# Altium PCB filters.PcbDoc
Units mil, origin at the board's own origin, x right, y up, seen from the top; angles counter-clockwise.
Board outline 4180 x 3765 mil, 4 copper layers (Top Layer, Layer 1, Layer 2, Bottom Layer), stack 23.756 mil thick; 58 components, 34 nets, 151 pads, 0 vias.
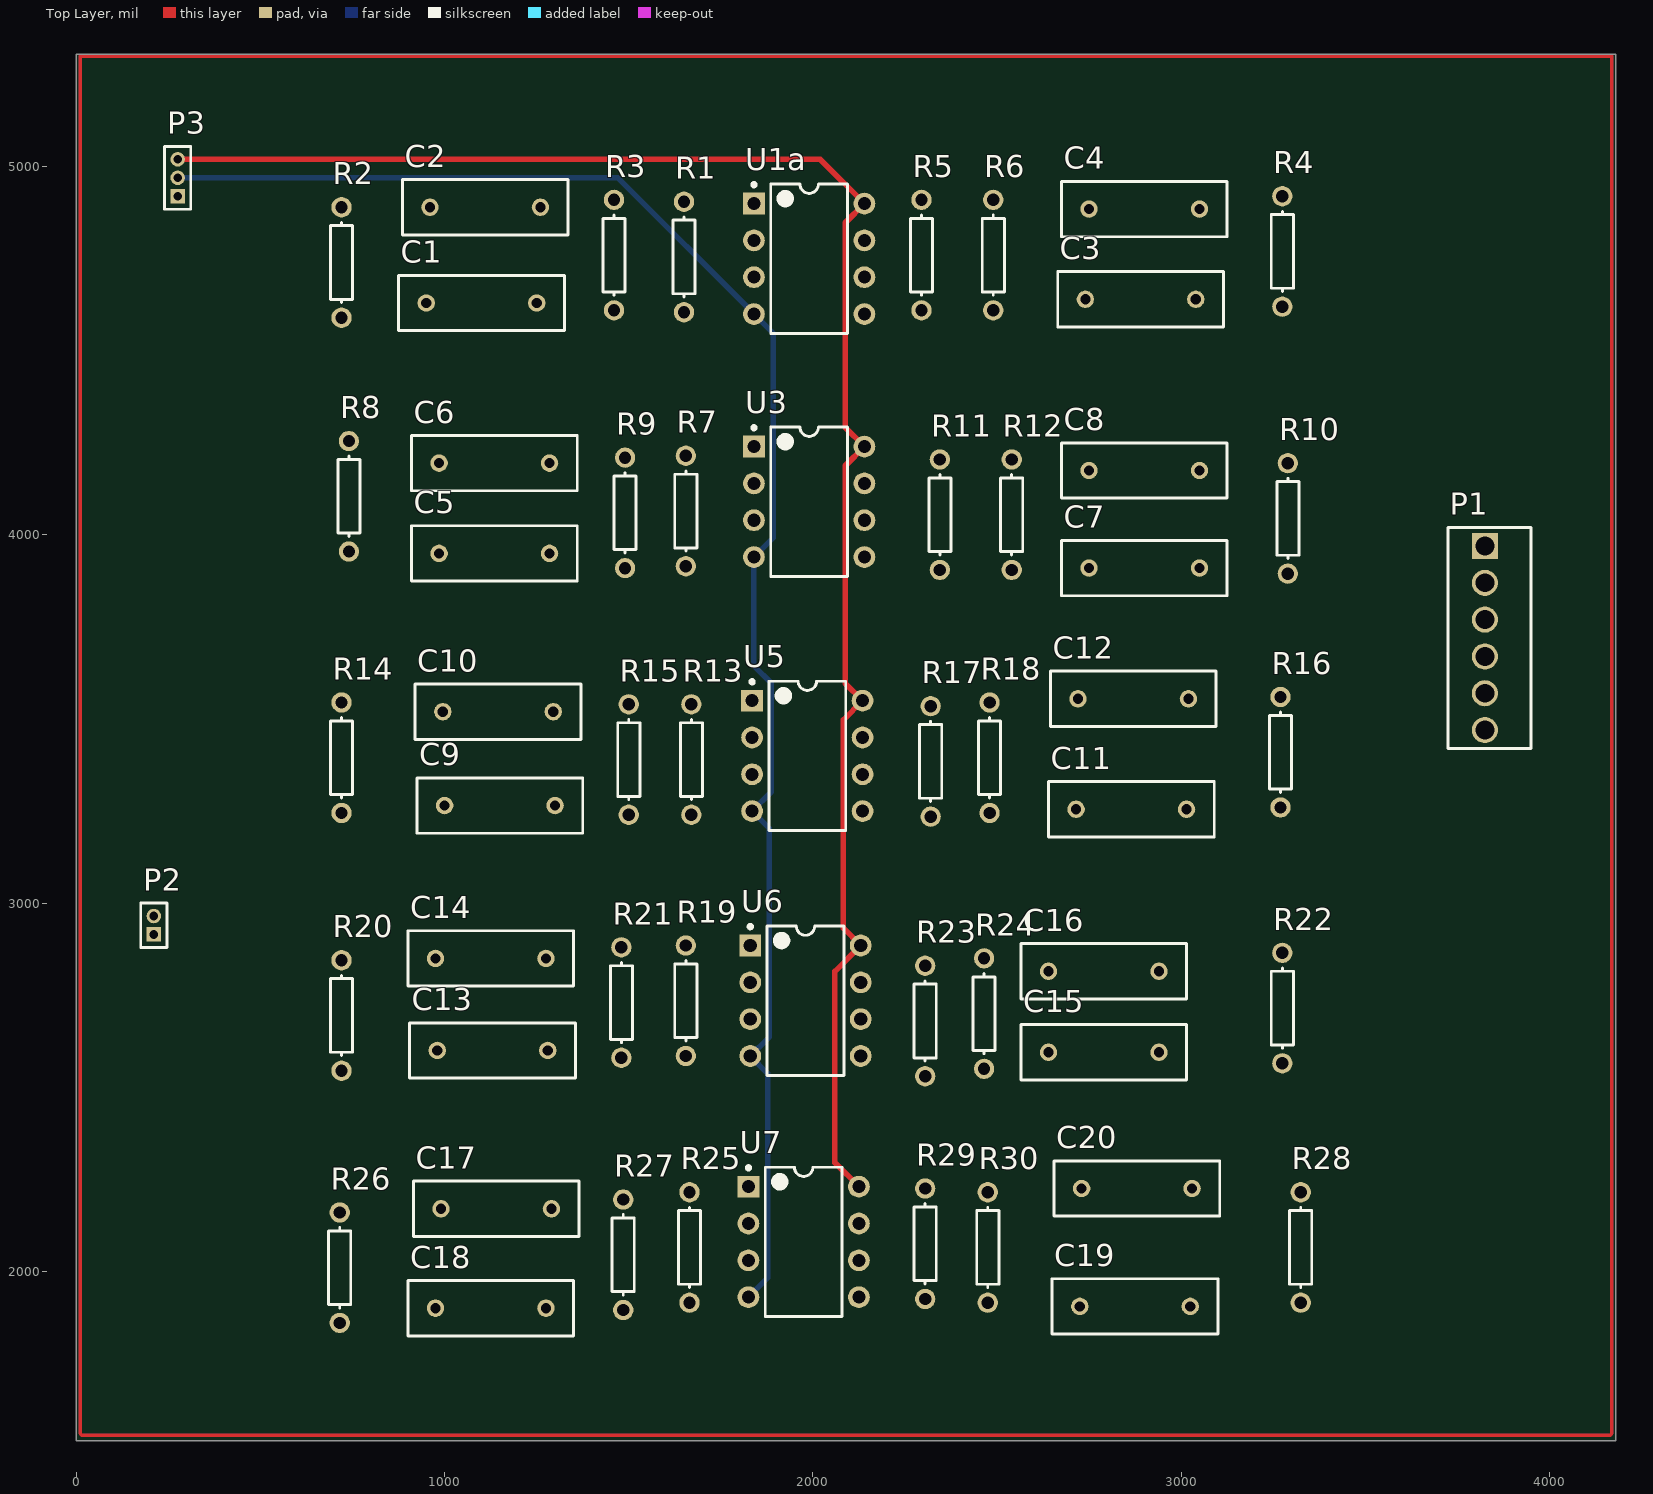
[diagram p0: Top Layer view]
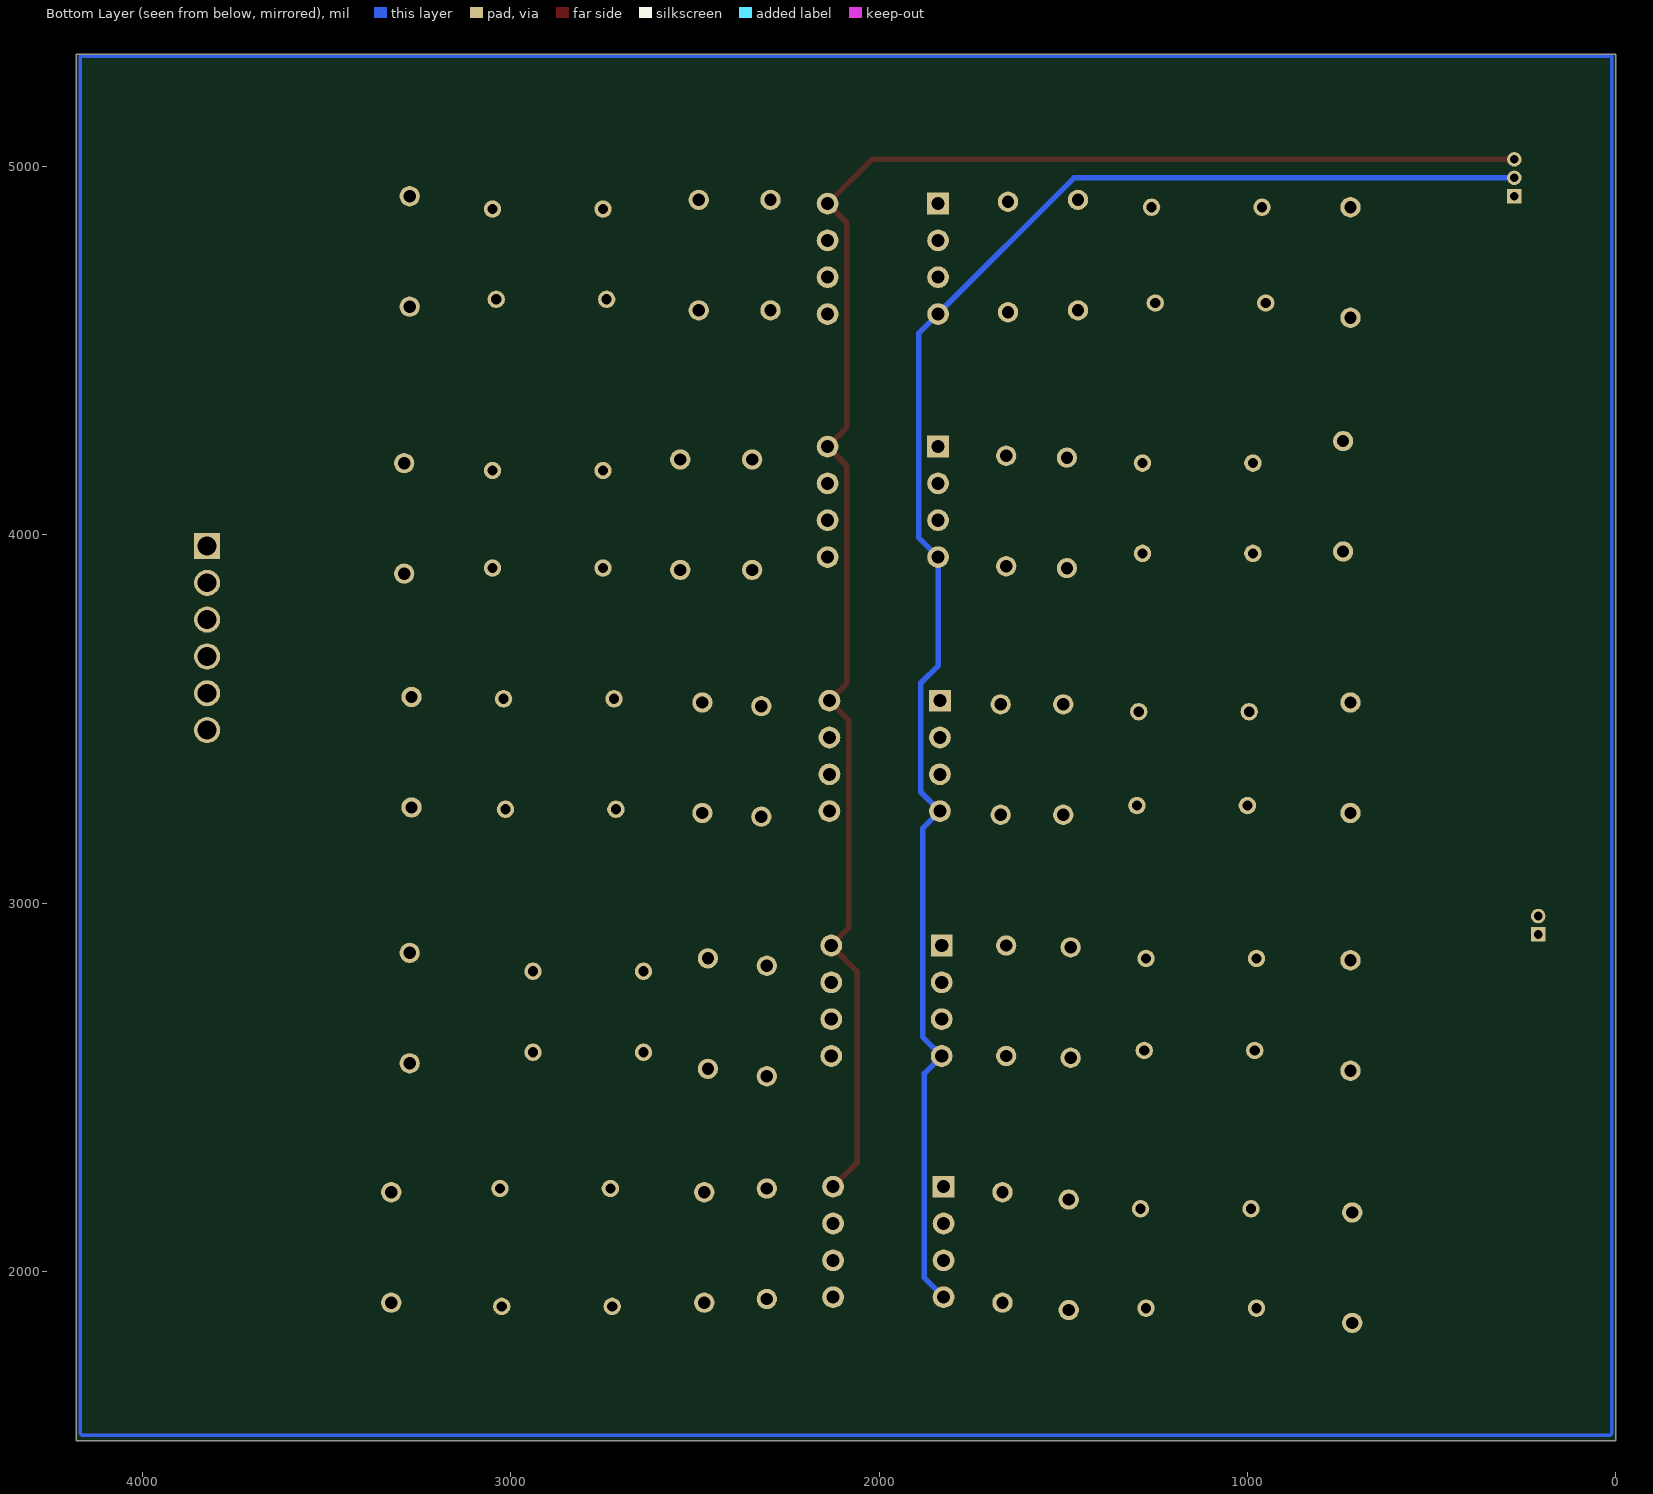
[diagram p1: Bottom Layer view, seen from below]
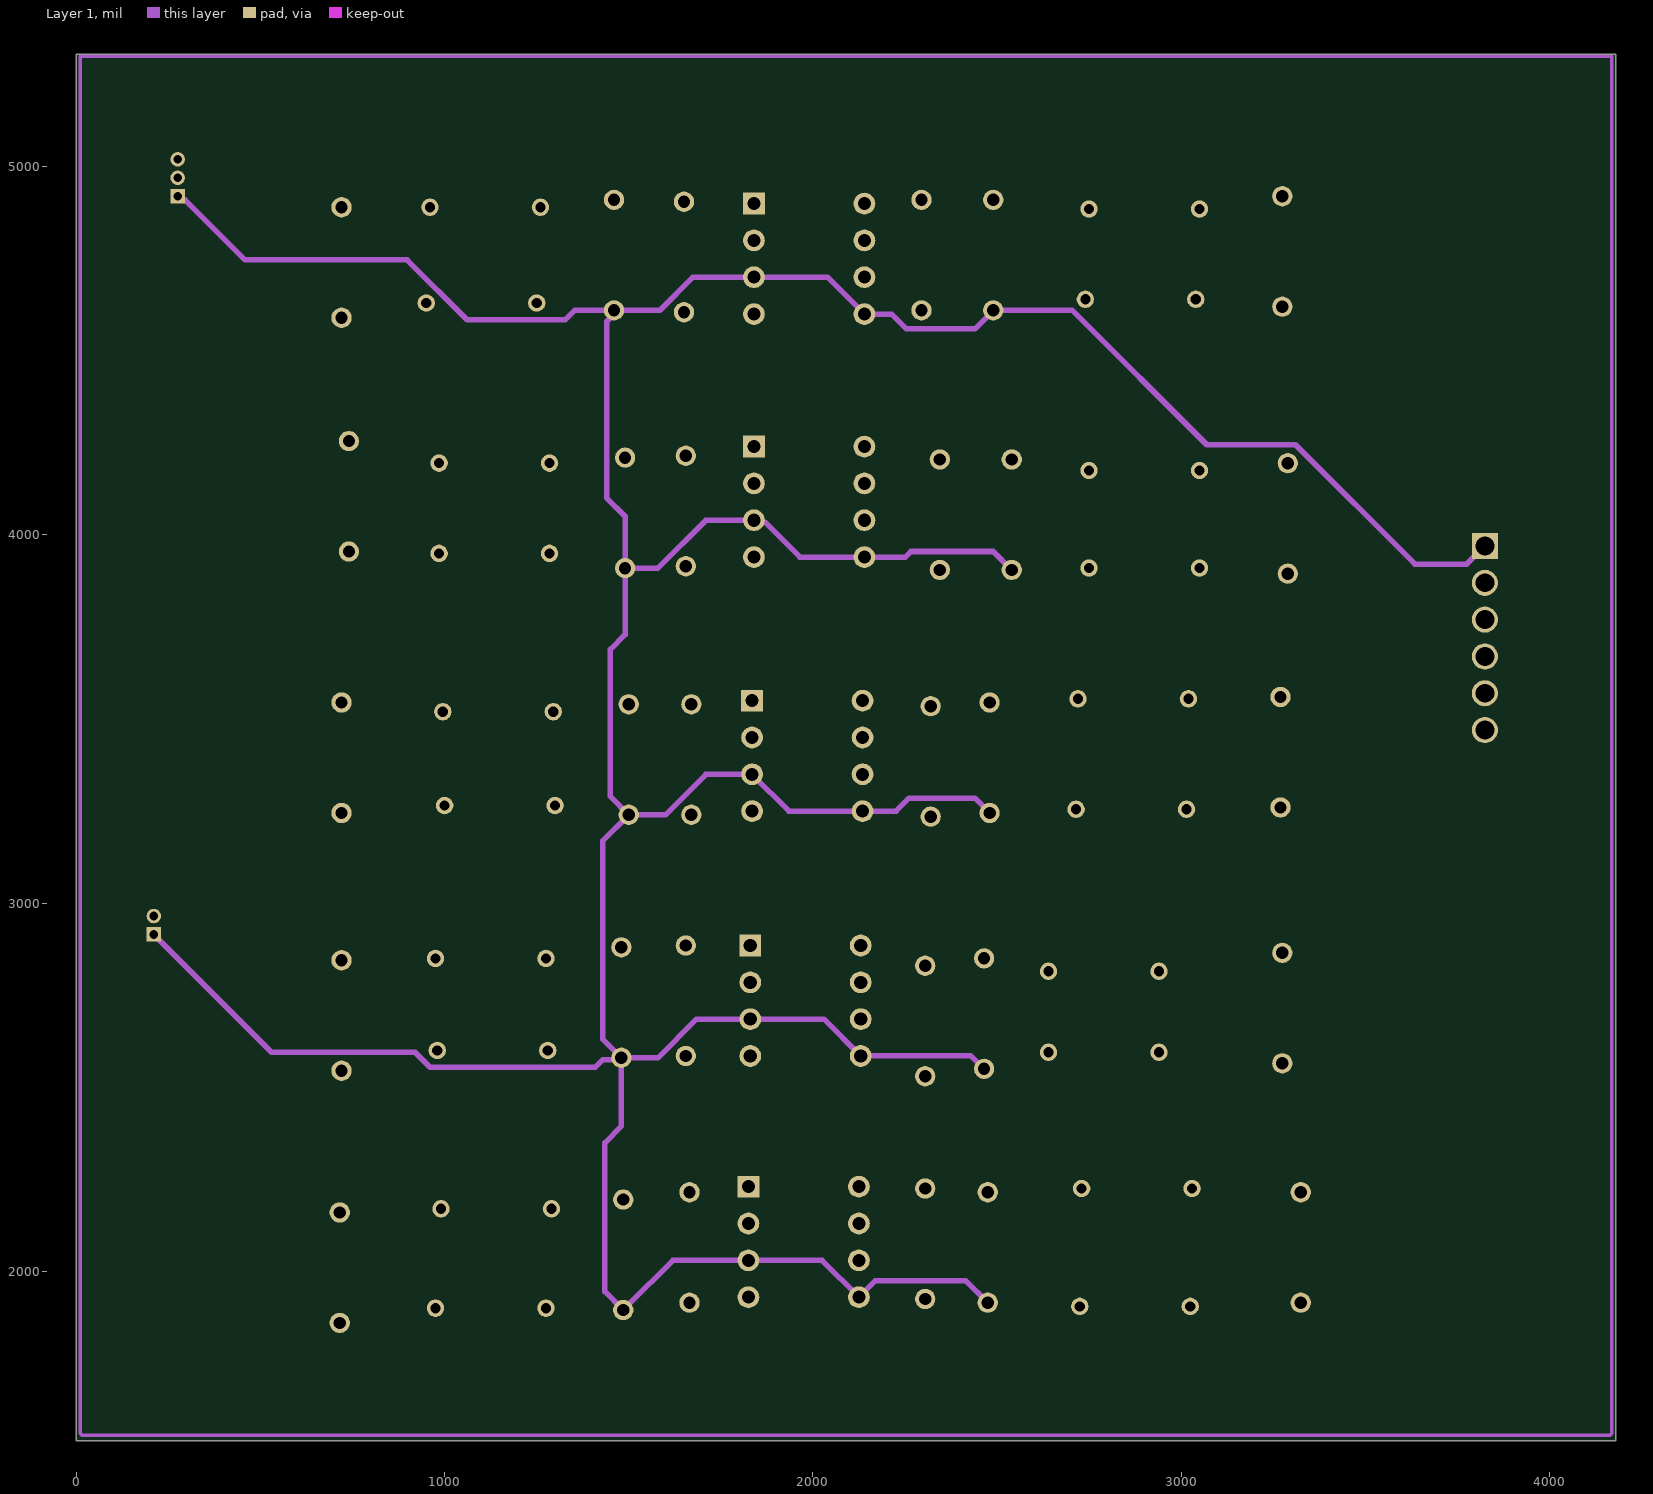
[diagram p2: Layer 1]
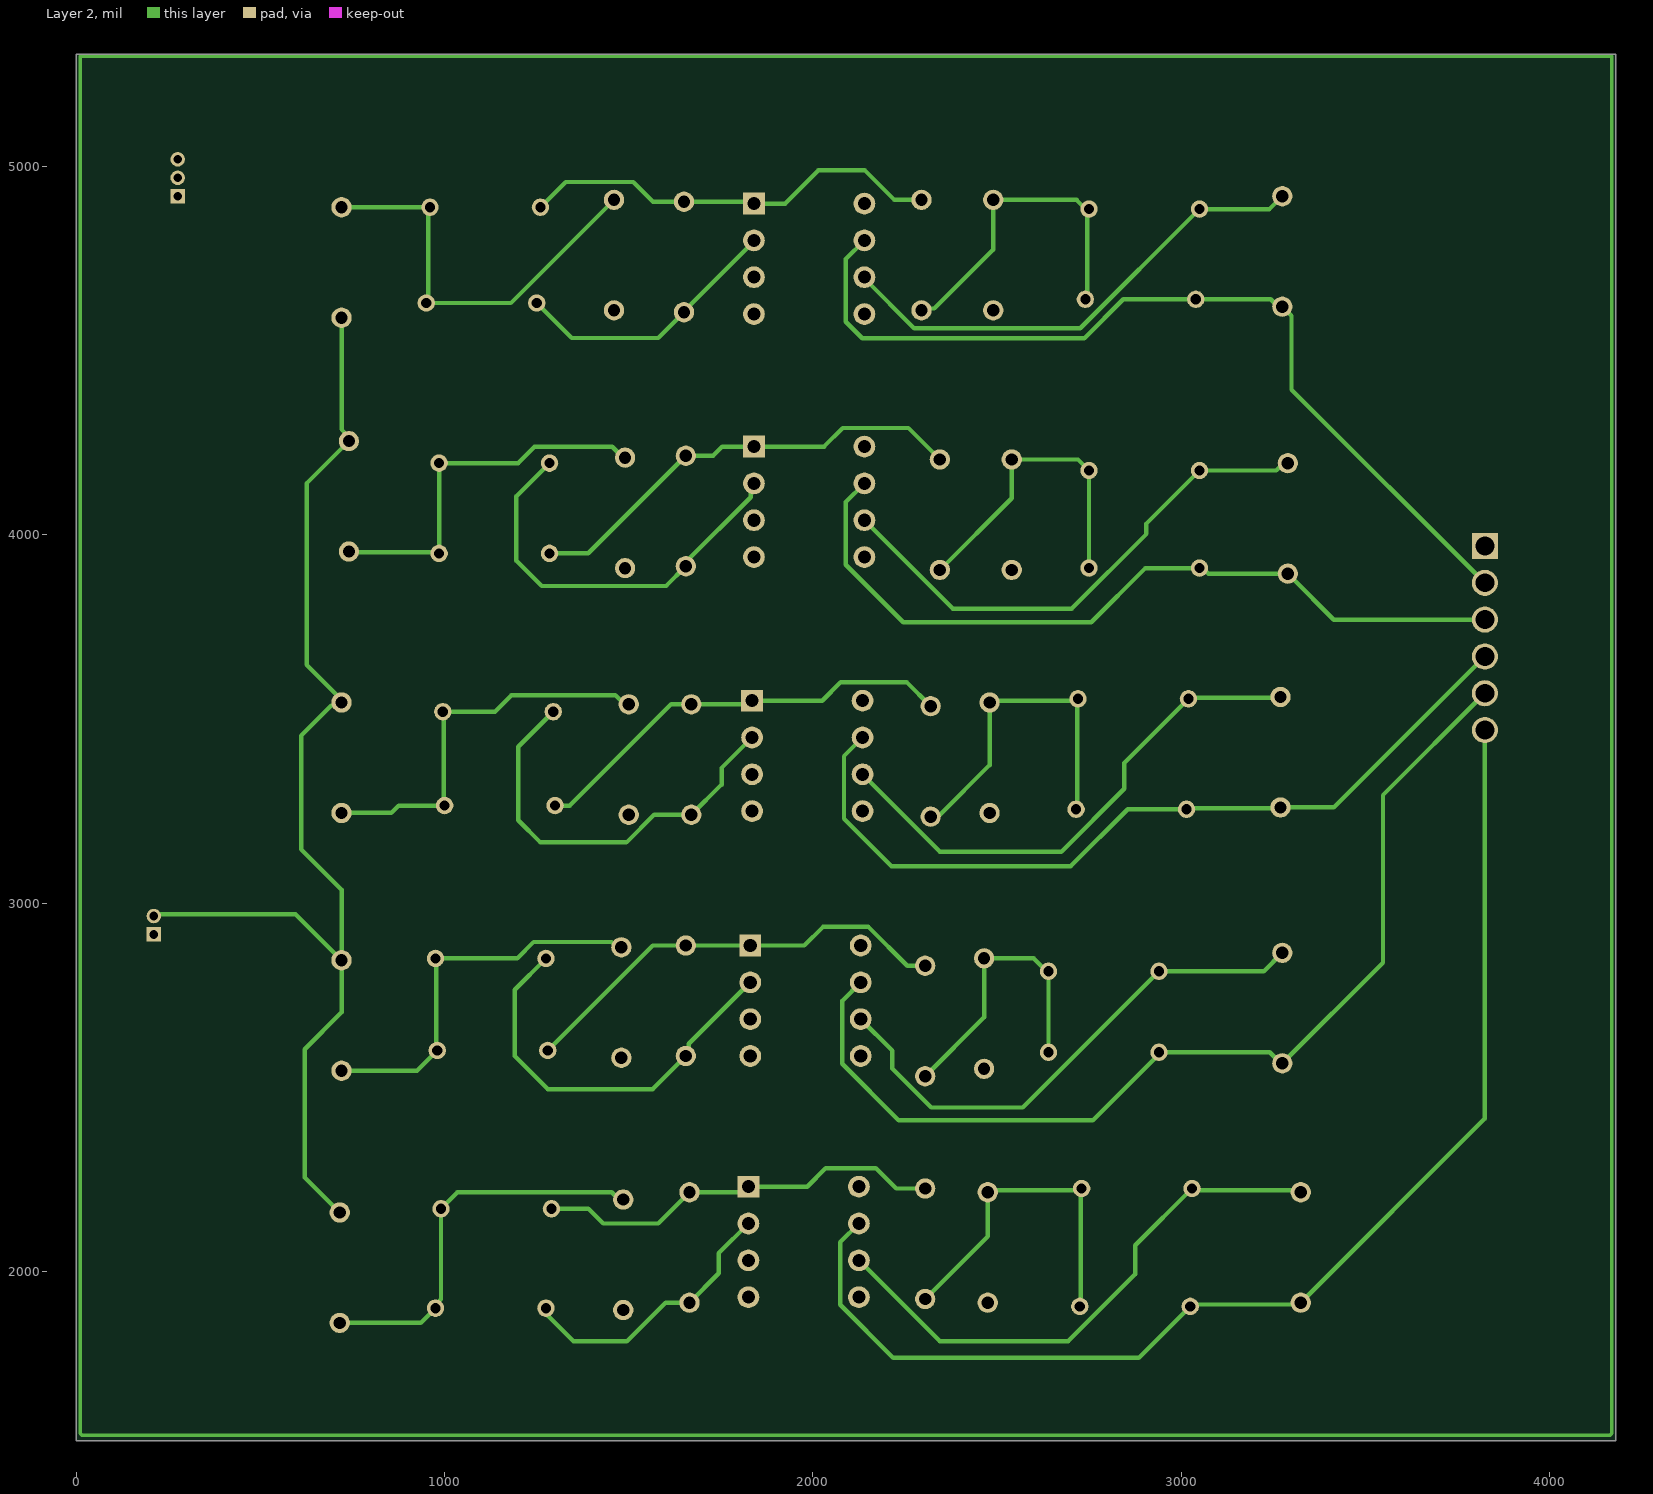
[diagram p3: Layer 2]

## Layer stack, top to bottom
Top Solder: solder mask 0.4, Solder Resist, Dk 3.5
Top Layer: signal copper 1.4
Dielectric 2: prepreg 2.8, PP-006, Dk 4.1
Layer 1: signal copper 1.378
Dielectric 1: dielectric 12.6, FR-4, Dk 4.8
Layer 2: signal copper 1.378
Dielectric 3: prepreg 2.8, PP-006, Dk 4.1
Bottom Layer: signal copper 1.4
Bottom Solder: solder mask 0.4, Solder Resist, Dk 3.5

## Board outline
0,1540 4180,1540 4180,5305 0,5305

## Design rules (kind name [scope] priority, off if disabled: settings)
Clearance [All] p1: gap=15 ignorepadtopadclearanceinfootprint=FALSE except(20: Arc-Hole Track-Hole SMDPad-Hole THPad-Hole Via-Hole Fill-Hole Poly-Hole Region-Hole Text-Hole)
PolygonConnect [All] p1: connectstyle=Relief reliefconductorwidth=10 reliefentries=4 polygonreliefangle="90 Angle" airgapwidth=10
RoomDefinition "filters tika.~(7)" [InComponentClass('filters tika.~(7)')] p1: confinementstyle=ConfineIn formatcopy=TRUE lockcomponents=FALSE outline 4975,2780 13440,2780 13440,3500 4975,3500
RoutingVias [All] p1: holewidth=28 width=50 viastyle="Through Hole" minholewidth=28 minwidth=50 maxholewidth=28 maxwidth=50
SolderMaskExpansion [All] p1: expansion=4 istentingtop=FALSE
Width [All] p1: maxlimit=25 minlimit=12 preferedwidth=20 toplayer_minwidth=15 midlayer1_minwidth=15 midlayer2_maxwidth=20 midlayer2_prefwidth=15 bottomlayer_minwidth=15 minimp=50.000000 maximp=50.000000 favimp=50.000000
30 further rules are at their usual default settings.

## Components (designator, comment, footprint, x,y, rotation, side; value= is the part's Value field where it differs from the comment)
C1 "" RAD-0.3 1100,4630 r180 top value=100nF
C2 "" RAD-0.3 1110,4890 r180 top value=100nF
C3 "" RAD-0.3 2890,4640 r180 top value=100nF
C4 "" RAD-0.3 2900,4885 r180 top value=100nF
C5 "" RAD-0.3 1135,3950 r180 top value=100nF
C6 "" RAD-0.3 1135,4195 r180 top
C7 "" RAD-0.3 2900,3910 r180 top value=100nF
C8 "" RAD-0.3 2900,4175 r180 top value=100nF
C9 "" RAD-0.3 1150,3265 r180 top value=10nF
C10 "" RAD-0.3 1145,3520 r180 top value=10nF
C11 "" RAD-0.3 2865,3255 r180 top value=10nF
C12 "" RAD-0.3 2870,3555 r180 top value=10nF
C13 "" RAD-0.3 1130,2600 r180 top value=10nF
C14 "" RAD-0.3 1125,2850 r180 top value=10nF
C15 "" RAD-0.3 2790,2595 r180 top value=10nF
C16 "" RAD-0.3 2790,2815 r180 top value=10nF
C17 "" RAD-0.3 1140,2170 r180 top value=1nF
C18 "C18" RAD-0.3 1125,1900 r180 top value=1nF
C19 "" RAD-0.3 2875,1905 r180 top value=1nF
C20 "" RAD-0.3 2880,2225 r180 top value=1nF
P1 "640456-6" TECO-640456-6_V 3825,3970 r270 top
P2 "MHDR1X2" MHDR1X2 210,2915 r90 top
P3 "MHDR1X3" MHDR1X3 275,4920 r90 top
R1 "" AXIAL-0.3 1650,4755 r270 top value=53.6K
R2 "" AXIAL-0.3 720,4740 r270 top value=11.5K
R3 "" AXIAL-0.3 1460,4760 r90 top value=13.7K
R4 "" AXIAL-0.3 3275,4770 r270 top value=14K
R5 "" AXIAL-0.3 2295,4760 r90 top value=2.94K
R6 "" AXIAL-0.3 2490,4760 r270 top value=3.57K
R7 "" AXIAL-0.3 1655,4065 r270 top value=15K
R8 "" AXIAL-0.3 740,4105 r90 top value=3.48K
R9 "" AXIAL-0.3 1490,4060 r90 top value=1.5K
R10 "" AXIAL-0.3 3290,4045 r270 top value=5.76K
R11 "" AXIAL-0.3 2345,4055 r90 top value=1.33K
R12 "" AXIAL-0.3 2540,4055 r270 top value=576
R13 "" AXIAL-0.3 1670,3390 r270 top value=37.4K
R14 "" AXIAL-0.3 720,3395 r90 top value=8.66K
R15 "" AXIAL-0.3 1500,3390 r90 top value=4.87K
R16 "" AXIAL-0.3 3270,3410 r270 top value=13K
R17 "" AXIAL-0.3 2320,3385 r90 top value=2.94K
R18 "" AXIAL-0.3 2480,3395 r270 top value=1.69K
R19 "" AXIAL-0.3 1655,2735 r270 top value=15.4K
R20 "" AXIAL-0.3 720,2695 r90 top value=3.74K
R21 "" AXIAL-0.3 1480,2730 r90 top value=909
R22 "" AXIAL-0.3 3275,2715 r270 top value=7.15K
R23 "" AXIAL-0.3 2305,2680 r90 top value=1.74K
R24 "" AXIAL-0.3 2465,2700 r270 top value=422
R25 "" AXIAL-0.3 1665,2065 r270 top value=82.5K
R26 "" AXIAL-0.3 715,2010 r90 top value=20.5K
R27 "" AXIAL-0.3 1485,2045 r90 top value=2.87K
R28 "" AXIAL-0.3 3325,2065 r270 top value=45.3K
R29 "" AXIAL-0.3 2305,2075 r90 top value=11.3K
R30 "" AXIAL-0.3 2475,2065 r270 top value=1.58K
U1a "LM4562NA" N08E 1990,4750 r0 top
U3 "LM4562NA" N08E 1990,4090 r0 top
U5 "LM4562NA" N08E 1985,3400 r0 top
U6 "LM4562NA" N08E 1980,2735 r0 top
U7 "LM4562NA" N08E 1975,2080 r0 top

## Footprints (in the part's own frame and the unit in brackets; to place one, negate y for a bottom-side part, rotate by r counter-clockwise, add the part's x,y. Pads: shape width x height; smd on the part's side, far side on the other; paste and mask are expansions set on the pad)
AXIAL-0.3 [mm] "Axial Device, Thru-Hole; 2 Leads; 0.3 in Pin Spacing"
  round 1.4 hole 0.85: 1(-3.81,0) 2(3.81,0)
  silkscreen extent -2.77,-0.76 2.77,0.76
MHDR1X2 [mm] "Connector; Header; 2 Position"
  rect 1x1 hole 0.6: 1(0,0)
  round 1 hole 0.6: 2(1.27,0)
  silkscreen extent -0.9,-0.9 2.17,0.9
MHDR1X3 [mm] "Connector; Header; 3 Position"
  rect 1x1 hole 0.6: 1(0,0)
  round 1 hole 0.6: 2(1.27,0) 3(2.54,0)
  silkscreen extent -0.9,-0.9 3.44,0.9
N08E [mm] "DIP, 8-Pin, Row Spacing 7.62 mm, Pitch 2.54 mm"
  rect 1.5x1.5 hole 0.9: 1(-3.81,3.81)
  round 1.5 hole 0.9: 2(-3.81,1.27) 3(-3.81,-1.27) 4(-3.81,-3.81) 5(3.81,-3.81) 6(3.81,-1.27) 7(3.81,1.27) 8(3.81,3.81)
  silkscreen extent -3.93,-5.15 2.65,5.23, body extent -3.6,-5.15 3.6,5.15, height 5.33
RAD-0.3 [mm] "Radial Cap, Thru-Hole; 2 Leads; 0.3 in Pin Spacing"
  round 1.2 hole 0.7: 1(-3.81,0) 2(3.81,0)
  silkscreen extent -5.71,-1.91 5.71,1.91
TECO-640456-6_V [mm] "THD, 6-Leads, Body 15.24x5.72mm, Pitch 2.54mm"
  rect 1.8x1.8 hole 1.3: 1(0,0)
  round 1.8 hole 1.3: 2(2.54,0) 3(5.08,0) 4(7.62,0) 5(10.16,0) 6(12.7,0)
  silkscreen extent -1.27,-2.54 13.97,3.18, body extent -1.27,-2.54 13.97,3.18, height 10.03

## Part data
C1 C2 C3 C4 C5 C6 C7 C8 C9 C10 C11 C12 C13 C14 C15 C16 C17 C18 C19 C20: library part Cap, "Capacitor", LatestRevisionDate=17-Jul-2002, LatestRevisionNote="Re-released for DXP Platform.", PackageDescription="Radial Cap, Thru-Hole; 2 Leads; 0.3 in Pin Spacing", PackageReference=RAD-0.3, Published=8-Jun-2000, Publisher="Altium Limited"
P1: library part CMP-2000-05661-1, "Male Header, Pitch 2.54 mm, 1 x 6 Position, Height 10.03 mm, Tail Length 3.56 mm, -55 to 105 degC, Bulk", Color=White, Current, Rating="5 /  / A", Flammability Rating=UL94V-0, Manufacturer="TE Connectivity", Package Description="Male Header, Pitch 2.54 mm, 1 x 6 Position, Height 10.03 mm, Tail Length 3.56 mm", Temperature, Operating="-55to+105 /  / °C", Voltage, Rating="250 /  / V", Agency Approvals=CSA,UL, Angle=Straight, Brand/Series=MTA-100Series, Color, Housing=White, Connector Type=MTA-100, Contact Centerline Spacing="0.100 /  / in.", Contact Mating Area Plating=Tin, Contact Plating=Tin, Contact Shape=Square, Contact Termination Area Plating=Tin, Datasheet URL=https://datasheet.ciiva.com/25618/0900766b80eb7fdd-25618163.pdf, Datasheet Version="Rev. W, 05/2005", Length, Overall="0.6 /  / \"", Length, Pin="0.14 /  / \"", Length, Terminal Post="0.14 /  / in.", Manufacturer URL=http://www.te.com/, Material, Contact=CopperAlloy, Material, Housing=Polyester, Mount Angle=Vertical, Mounting Hole Size="0.04 /  / \"", Mounting Technology=ThroughHole, Mounting Type=PCMount, Number of Contacts=6, Number of Positions=6, Number of Rows=1, Package Reference=640456-6, Pin Spacing="0.1 /  / \"", Primary Type=InterconnectSystem, Size, Post="0.025 /  / in.", Special Features=Pinstrip, Standards=RoHSCompliant,ELVCompliant,UL94V-0, Termination=Solder, Type=PCBPlug
P2: "Header, 2-Pin", LatestRevisionDate=17-Jul-2002, LatestRevisionNote="Re-released for DXP Platform.", Publisher="Altium Limited"
P3: "Header, 3-Pin", LatestRevisionDate=17-Jul-2002, LatestRevisionNote="Re-released for DXP Platform.", Publisher="Altium Limited"
R1 R2 R3 R4 R5 R6 R7 R8 R9 R10 R11 R12 R13 R14 R15 R16 R17 R18 R19 R20 R21 R22 R23 R24 R25 R26 R27 R28 R29 R30: library part Res1, "Resistor", LatestRevisionDate=17-Jul-2002, LatestRevisionNote="Re-released for DXP Platform.", PackageDescription="Axial Device, Thru-Hole; 2 Leads; 0.3 in Pin Spacing", PackageReference=AXIAL-0.3, Published=8-Jun-2000, Publisher="Altium Limited"
U1a U3 U5 U6 U7: library part CMP-0057-00043-2, "Dual High Performance, High Fidelity Audio Operational Amplifier, 8-pin MDIP", Manufacturer="National Semiconductor", PackageTopMarking=NSUZXYTT*LM*4562NA, PowerWise=Y, Code_JEDEC=MS-001-BA, ComponentLink1Description="LM4562 Datasheet", ComponentLink1URL=http://www.national.com/ds/LM/LM4562.pdf, ComponentLink2Description="LM4562 Web Page", ComponentLink2URL=http://www.national.com/pf/LM/LM4562.html, ComponentLink3Description="N08E Package Page", ComponentLink3URL=http://www.national.com/packaging/folders/n08e.html, CompType="Audio IC", DatasheetVersion=Jan-2010, PackageDescription="MDIP, .365 x .250 x .130in, 8 Lead, .100in Pitch", PackageReference=N08E, PackageVersion="revG, May-2006", PinCount=8, RevisionNote="Component URLs added", RoHS=Y

## Nets (pads, with @x,y where several pads share a name; then routed paths per layer and width w, separated by ;. In a path a pad name is that pad's centre, name@x,y a point inside that pad or via, vN(x,y) a via of type N, cw(c..) or ccw(c..) an arc to the next point about the centre after c; other vN are vias at no path point)
GND: P1.1 P2.1 P3.1 R3.1 R6.2 R9.1 R12.2 R15.1 R18.2 R21.1 R24.2 R27.1 R30.2 U1a.3 U1a.5 U3.3 U3.5 U5.3 U5.5 U6.3 U6.5 U7.3 U7.5 | length 12920.9
  Layer 1 w15: P2.1 529.94,2595.06 919.71,2595.06 960.9,2553.88 1408.88,2553.88 1429.94,2574.94 1474.94,2574.94 R21.1 ; P3.1 285,4910 295,4910 458.06,4746.94 898.29,4746.94 1061.35,4583.88 1326.96,4583.88 1353.08,4610 R3.1 ; R24.2 2464.21,2550 2429.21,2585 U6.5 2030,2685 U6.3 1684.21,2685 1579.21,2580 R21.1 ; R30.2 2414.94,1975.06 2170.06,1975.06 U7.5 2025,2030 U7.3 1620,2030 1498.1,1908.1 1498.1,1901.9 1500,1900 1495,1895 R27.1 1434.94,1945.06 1434.94,2349.17 1480,2394.23 R21.1 ; R18.2 2439.94,3285.06 2261.36,3285.06 2226.3,3250 U5.5 1935,3250 U5.3 1709.21,3350 1599.21,3240 R15.1 ; R12.2 2489.94,3955.06 2266.36,3955.06 2251.3,3940 U3.5 1965,3940 1870,4035 1845,4035 U3.3 1709.21,4040 1579.21,3910 R9.1 ; P1.1 3775.85,3920.85 3634.94,3920.85 3310.74,4245.06 3069.71,4245.06 2704.77,4610 R6.2 2439.94,4559.94 2253.86,4559.94 2213.8,4600 U1a.5 2040,4700 U1a.3 1674.21,4700 1584.21,4610 R3.1 ; R3.1 1460,4599.14 1439.94,4579.09 1439.94,4100.83 1490,4050.77 R9.1 ; R21.1 1429.94,2630.06 1429.94,3169.94 R15.1 ; R9.1 1490,3729.23 1449.94,3689.17 1449.94,3290.06 R15.1
  Layer 2 w12: R6.2 R6.2@2490,4615
Net_1: C18.1 R25.2 U7.2 | length 760.8
  Layer 2 w12: C18.1 1280,1895 1280,1880 1350,1810 1495,1810 1600,1915 R25.2 1744.62,1994.62 1744.62,2049.62 U7.2
Net_2: C17.2 C18.2 R26.1 R27.2 | length 1074.4
  Layer 2 w12: R26.1 935,1860 C18.2 975,1909.54 990,1924.54 C17.2 1034.62,2214.62 1453.71,2214.62 1473.33,2195 R27.2
NetC1_1: C1.1 R1.2 U1a.2 | length 742
  Layer 2 w12: C1.1 1345,4535 1580,4535 R1.2 1655,4610 1655,4612.5 1840,4797.5 U1a.2
NetC1_2: C1.2 C2.2 R2.1 R3.2 | length 1130.1
  Layer 2 w12: R2.1 C2.2 955,4885 955,4635 C1.2 1180,4630 R3.2
NetC2_1: C2.1 R1.1 R5.2 U1a.1 | length 1158.1
  Layer 2 w12: C2.1 1328.56,4958.56 1512.33,4958.56 1565.89,4905 R1.1 1835,4905 U1a.1 1925,4900 2015,4990 2141.47,4990 2221.47,4910 R5.2
NetC3_1: C3.1 P1.2 R4.2 U1a.7 | length 2482.3
  Layer 2 w12: U1a.7 2089.47,4749.47 2089.47,4579.07 2134.1,4534.44 2737.62,4534.44 2843.18,4640 C3.1 3050,4640 3055,4645 3055,4641.28 3056.28,4640 3243.33,4640 3263.33,4620 R4.2 3300,4595 3300,4394.44 3824.44,3870 P1.2
NetC3_2: C3.2 C4.2 R5.1 R6.1 | length 917.8
  Layer 2 w12: R5.1 2300,4615 2330,4615 2490,4775 R6.1 2716.14,4910 2741.14,4885 C4.2 2745,4880 2745,4645 C3.2
NetC4_1: C4.1 R4.1 U1a.6 | length 1356.5
  Layer 2 w12: U1a.6@2135,4695 U1a.6@2141.33,4695 ; U1a.6 2140,4696.33 U1a.6@2141.33,4695 ; R4.1 3240,4885 3055,4885 3050,4880 C4.1 2726.44,4561.44 2274.89,4561.44 U1a.6@2141.33,4695
NetC5_1: C5.1 R7.1 R11.2 U3.1 | length 1261.5
  Layer 2 w12: C5.1@1295,3940 1285,3940 C5.1 1390,3950 R7.1 1729.07,4215 1754.07,4240 U3.1 2030.4,4240 2080.93,4290.53 2259.47,4290.53 R11.2 R11.2@2345,4200
NetC5_2: C5.2 C6.2 R8.1 R9.2 | length 1027.1
  Layer 2 w12: R8.1 742.5,3952.5 982.5,3952.5 C5.2@983.75,3951.25 ; C5.2 C5.2@983.75,3951.25 ; R9.2 1484.81,4210 1455.19,4239.62 1243.93,4239.62 1199.31,4195 C6.2 985,3952.5 C5.2@983.75,3951.25
NetC6_1: C6.1 R7.2 U3.2 | length 1114.5
  Layer 2 w12: C6.1 1195,4105 1195,3930 1263.56,3861.44 1601.44,3861.44 R7.2 1655,3926.46 1831,4102.45 1831,4131 U3.2
NetC7_1: C7.1 P1.3 R10.2 U3.7 | length 2178
  Layer 2 w12: U3.7 2089.47,4089.47 2089.47,3919.07 2245.54,3763 2756.18,3763 2903.18,3910 C7.1 3059.54,3910 3074.54,3895 3280,3895 3290,3885 R10.2 3295,3895 3300,3890 3300,3885 3415,3770 P1.3
NetC7_2: C7.2 C8.2 R11.1 R12.1 | length 868.2
  Layer 2 w12: R11.1 2540,4100 R12.1 2720,4205 C8.2 C7.2
NetC8_1: C8.1 R10.1 U3.6 | length 1429.5
  Layer 2 w12: U3.6 2380,3800 2703.11,3800 2905.87,4002.76 2905.87,4030.87 C8.1 3258.33,4175 3278.33,4195 R10.1
NetC9_1: C9.1 R13.1 R17.2 U5.1 | length 1186.1
  Layer 2 w12: C9.1 1340,3265 1615,3540 R13.1 1825,3540 U5.1 2025.4,3550 2075.93,3600.53 2254.47,3600.53 R17.2
NetC9_2: C9.2 C10.2 R14.1 R15.2 | length 1079
  Layer 2 w12: R14.1 855.19,3245 875.19,3265 C9.2 997.5,3267.5 997.5,3517.5 C10.2 1136.7,3520 1181.32,3564.62 1463.71,3564.62 1488.33,3540 R15.2
NetC10_1: C10.1 R13.2 U5.2 | length 1138.6
  Layer 2 w12: C10.1 1200,3425 1200,3225 1260,3165 1493.67,3165 1568.67,3240 R13.2 1752.12,3322.12 1752.12,3367.12 U5.2
NetC11_1: C11.1 P1.4 R16.2 U5.7 | length 2272
  Layer 2 w12: U5.7 2084.47,3399.47 2084.47,3229.07 2213.54,3100 2700,3100 2855,3255 C11.1 3017.5,3257.5 3267.5,3257.5 R16.2 3415,3260 P1.4
NetC11_2: C11.2 C12.2 R17.1 R18.1 | length 930.7
  Layer 2 w12: R17.1 2325,3240 2345,3240 2480,3375 R18.1 2485,3550 2715,3550 C12.2@2717.5,3552.5 ; C11.2 2717.5,3257.5 C12.2@2717.5,3552.5 ; C12.2 C12.2@2717.5,3552.5
NetC12_1: C12.1 R16.1 U5.6 | length 1437
  Layer 2 w12: U5.6 2345,3140 2675,3140 2845.68,3310.68 2845.68,3380.68 C12.1 3025,3555 3027.5,3557.5 3267.5,3557.5 R16.1
NetC13_1: C13.1 R19.1 R23.2 U6.1 | length 1207.7
  Layer 2 w12: C13.1 1565,2885 R19.1 U6.1 1976.96,2885 2027.49,2935.53 2150.93,2935.53 2256.46,2830 R23.2
NetC13_2: C13.2 C14.2 R20.1 R21.2 | length 1064.4
  Layer 2 w12: R20.1 925,2545 C13.2 977.5,2602.5 977.5,2847.5 C14.2 1196.81,2850 1241.43,2894.62 1453.71,2894.62 1468.33,2880 R21.2
NetC14_1: C14.1 R19.2 U6.2 | length 1112.3
  Layer 2 w12: C14.1 1190,2765 1190,2585 1280,2495 1565,2495 R19.2 1663.25,2593.25 1663.25,2618.25 U6.2
NetC15_1: C15.1 P1.5 R22.2 U6.7 | length 2826
  Layer 2 w12: U6.7 2079.47,2734.47 2079.47,2564.07 2233.54,2410 2760,2410 2940,2590 C15.1 3240.57,2595 3270.57,2565 R22.2 3548.49,2838.49 3548.49,3293.49 P1.5
NetC15_2: C15.2 C16.2 R23.1 R24.1 | length 803.1
  Layer 2 w12: R23.1@2312.31,2530 R23.1 2465,2690 R24.1 2599.64,2850 2634.64,2815 C16.2 C15.2
NetC16_1: C16.1 R22.1 U6.6 | length 1449.8
  Layer 2 w12: U6.6 2215.44,2599.56 2215.44,2550.88 2321.33,2445 2570,2445 2930,2805 2935,2805 2940,2810 C16.1 3225,2815 R22.1
NetC17_1: C17.1 R25.1 R29.2 U7.1 | length 1129
  Layer 2 w12: C17.1@1280,2165 1285,2170 C17.1 1390.55,2170 1430.55,2130 1580,2130 R25.1 1810,2215 U7.1 1984.47,2230 2035,2280.53 2170.94,2280.53 2226.47,2225 R29.2
NetC19_1: C19.1 P1.6 R28.2 U7.7 | length 3379.2
  Layer 2 w12: U7.7 2074.47,2079.47 2074.47,1909.07 2218.54,1765 2885,1765 3020,1900 3025,1900 C19.1 3030,1910 3320,1910 R28.2 3825,2415 P1.6
NetC19_2: C19.2 C20.2 R29.1 R30.1 | length 949.6
  Layer 2 w12: R29.1@2310,1920 2305,1920 R29.1 2475,2095 R30.1 2475,2220 C20.2@2725,2220 ; C19.2 2727.5,1907.5 2727.5,2217.5 C20.2@2725,2220 ; C20.2 C20.2@2725,2220
NetC20_1: C20.1 R28.1 U7.6 | length 1512.9
  Layer 2 w12: U7.6 2345,1810 2693.11,1810 2875.68,1992.58 2875.68,2070.68 C20.1 3035,2220 3320,2220 R28.1
NetP2_2: P2.2 R2.2 R8.2 R14.2 R20.2 R26.2 | length 3272.7
  Layer 2 w12: P2.2 215,2970 595,2970 R20.2 ; R26.2 620,2255 620,2603.39 720,2703.39 R20.2 ; R2.2 720,4286.67 740,4266.67 R8.2 625,4140 625,3647.31 720,3552.31 R14.2 711.75,3536.75 691.75,3536.75 610,3455 610,3146.61 720,3036.61 R20.2
NetP3_2: P3.2 U1a.4 U3.4 U5.4 U6.4 U7.4 | length 4554.9
  Bottom Layer w15: P3.2 1470.79,4970 1840,4600.79 U1a.4 1892.03,4547.97 1892.03,3992.03 U3.4 1840,3644.53 1887.03,3597.5 1887.03,3302.03 U5.4 1882.03,3202.97 1882.03,2637.03 U6.4 1877.03,2537.97 1877.03,1982.03 U7.4
NetP3_3: P3.3 U1a.8 U3.8 U5.8 U6.8 U7.8 | length 4765.8
  Top Layer w15: P3.3 2020,5020 U1a.8 2087.97,4847.97 2087.97,4292.03 U3.8 2087.97,4187.97 2087.97,3597.03 U5.8 2082.97,3497.97 2082.97,2932.03 U6.8 2060,2815 2060,2295 U7.8

## Other copper
Multi-Layer:
  lines w10: 10,1560 10,5300 4170,5300 4170,1560 4165,1555 15,1555 10,1560